# Altium PCB PCB1_2.pcbdoc (part 1 of 2)
Units mil, origin at the board's own origin, x right, y up, seen from the top; angles counter-clockwise.
Board outline 3210 x 4490.62 mil, 2 copper layers (Top Layer, Bottom Layer); 32 components, 15 nets, 80 pads, 138 vias.
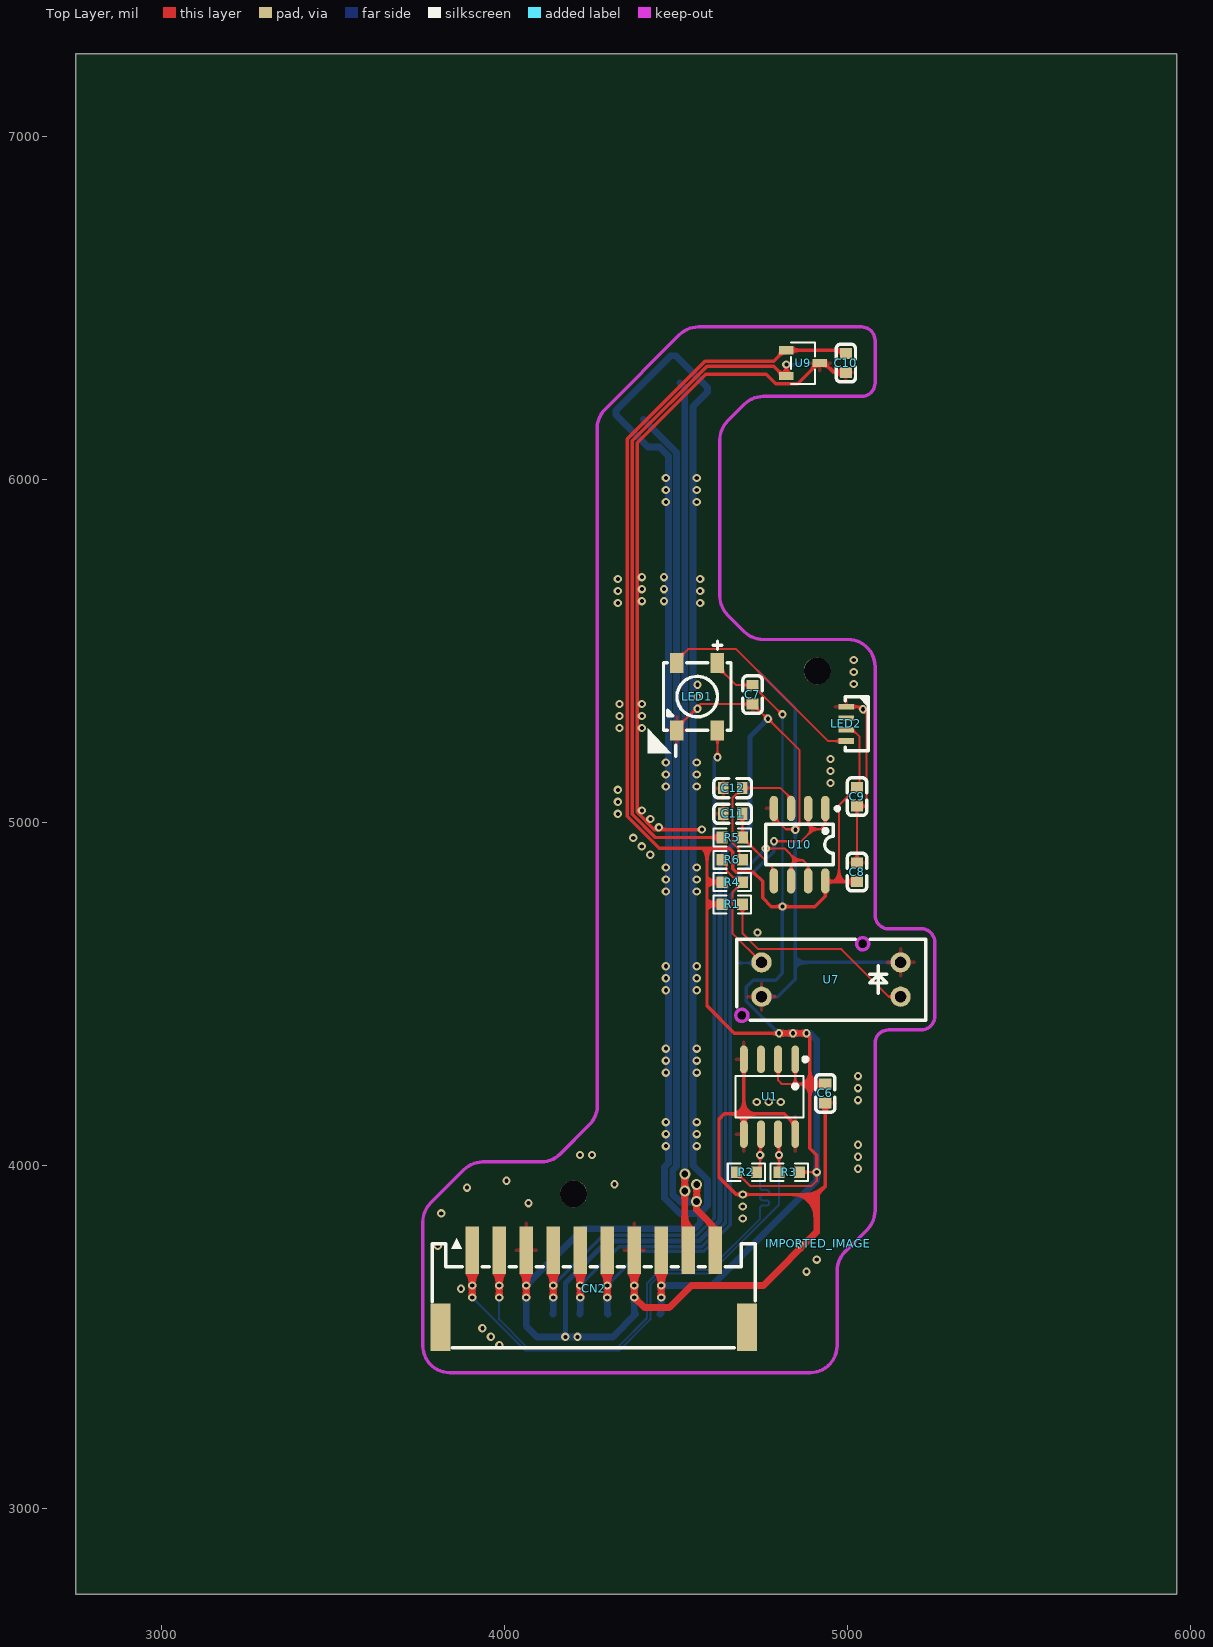
[diagram p0: Top Layer view]
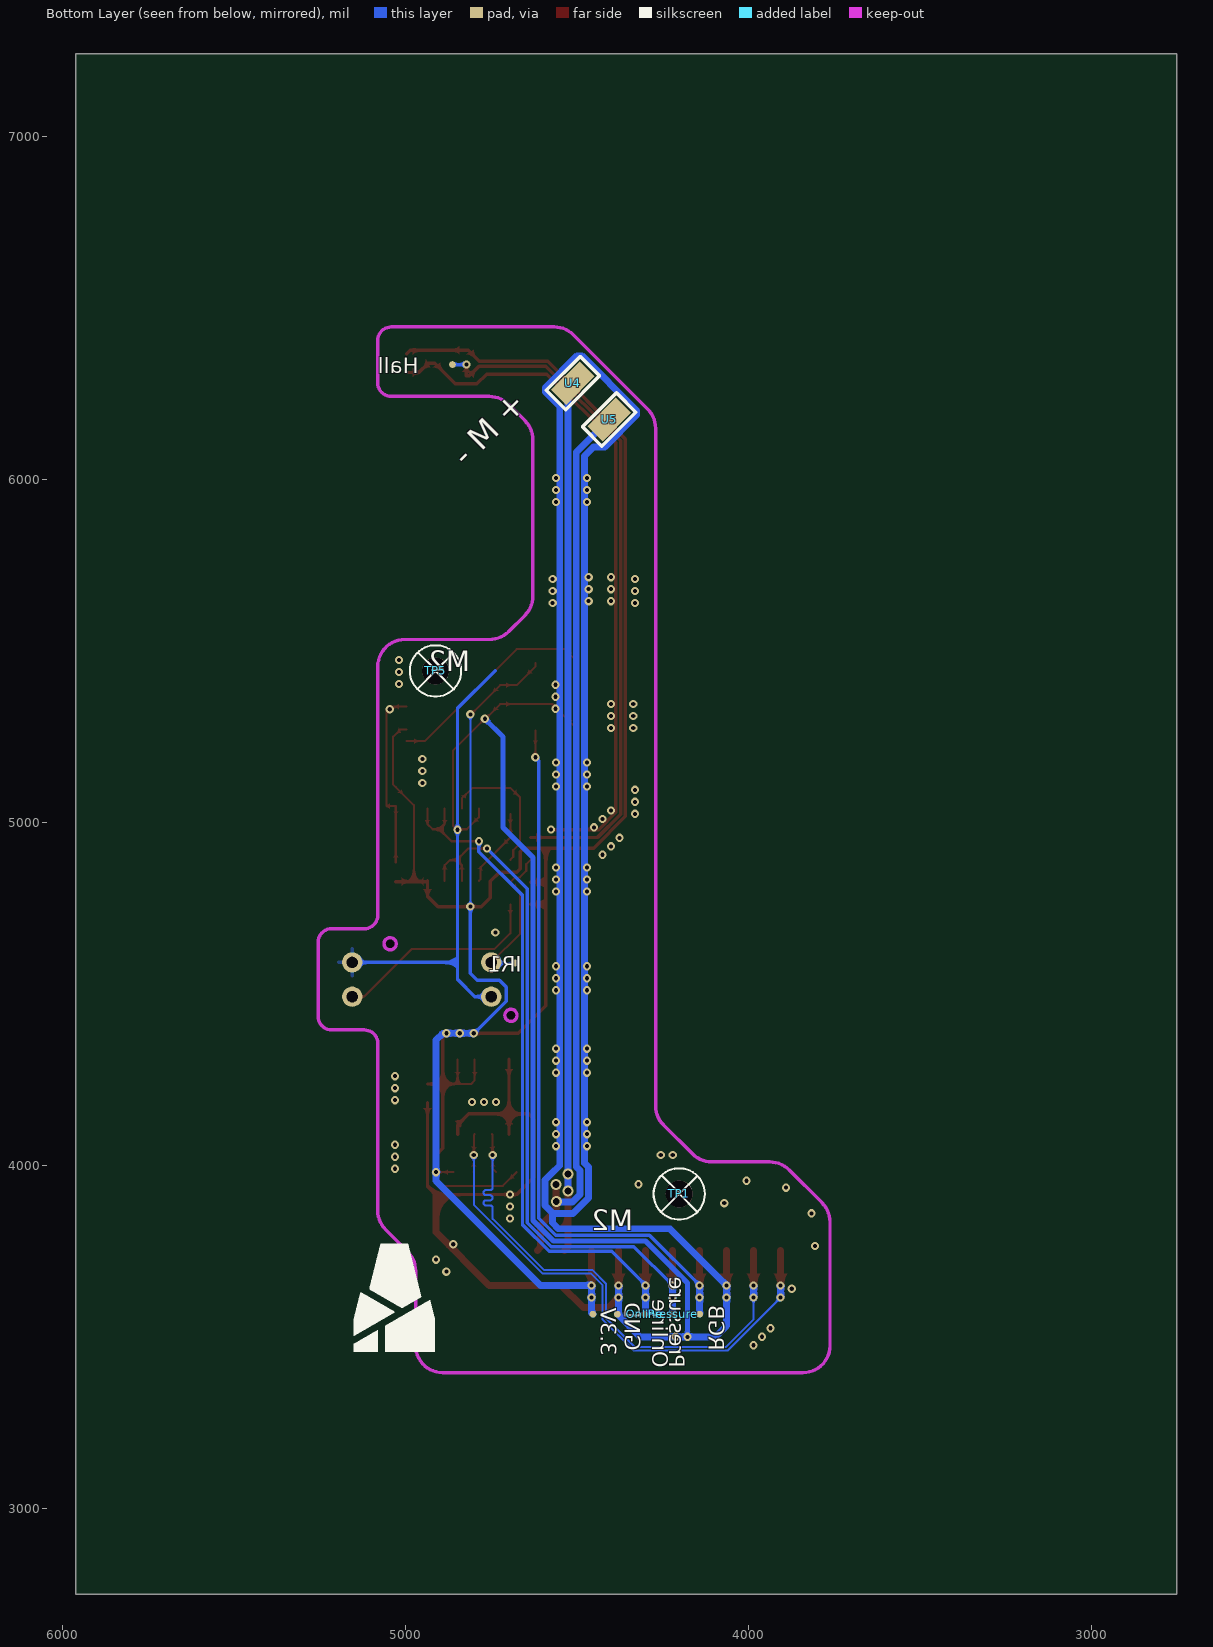
[diagram p1: Bottom Layer view, seen from below]

## Layer stack, top to bottom
Top Layer: signal copper (thickness not stored)
Dielectric: dielectric 12.6, FR-4, Dk 4.8
Bottom Layer: signal copper (thickness not stored)

## Board outline
5960,2750 2750,2750 2750,7240.62 5960,7240.62

## Design rules (kind name [scope] priority, off if disabled: settings)
BoardOutlineClearance copperThickness1oz [All] p0: genericclearance=10 ignorepadtopadclearanceinfootprint=FALSE except(0: Arc-SplitContinuation Track-SplitContinuation SMDPad-SplitContinuation THPad-SplitContinuation Via-SplitContinuation Fill-SplitContinuation Poly-SplitContinuation Region-SplitContinuation Text-SplitContinuation; 6: Track-CutoutEdge SMDPad-CutoutEdge THPad-CutoutEdge Via-CutoutEdge Region-CutoutEdge; 11.8: Track-OutlineEdge SMDPad-OutlineEdge THPad-OutlineEdge Via-OutlineEdge Fill-OutlineEdge Region-OutlineEdge Poly-OutlineEdge Text-OutlineEdge Fill-CutoutEdge)
BoardOutlineClearance copperThickness2oz [All] p0: genericclearance=10 ignorepadtopadclearanceinfootprint=FALSE except(0: Arc-SplitContinuation Track-SplitContinuation SMDPad-SplitContinuation THPad-SplitContinuation Via-SplitContinuation Fill-SplitContinuation Poly-SplitContinuation Region-SplitContinuation Text-SplitContinuation; 6: Track-CutoutEdge SMDPad-CutoutEdge THPad-CutoutEdge Via-CutoutEdge Region-CutoutEdge; 11.8: Track-OutlineEdge SMDPad-OutlineEdge THPad-OutlineEdge Via-OutlineEdge Fill-OutlineEdge Region-OutlineEdge Poly-OutlineEdge Text-OutlineEdge Fill-CutoutEdge)
Clearance copperThickness1oz [(InNet('GND') OR InNet('K_ONLINE') OR InNet('3.3V') OR InNet('MCU_SDA') OR InNet('K_PULL') OR InNet('MCU_SCL') OR InNet('MOTOR_LOUT') OR InNet('MOTOR_HOUT') OR InNet('RGB_OUT') OR InNet('IR1_RECV') OR InNet('HALL_OUT') OR InNet('$1N10852') OR InNet('$1N13047') OR InNet('IR1_RC') OR InNet('HALL_RC'))] p1: gap=7 ignorepadtopadclearanceinfootprint=FALSE except(4: Track-Track; 6: Track-SMDPad SMDPad-SMDPad Track-THPad SMDPad-THPad THPad-THPad Track-Via SMDPad-Via THPad-Via Via-Via SMDPad-Fill THPad-Fill Via-Fill Fill-Fill Track-Region SMDPad-Region THPad-Region Via-Region Region-Region Track-Poly SMDPad-Poly THPad-Poly Via-Poly Fill-Poly Region-Poly Poly-Poly Track-Text SMDPad-Text THPad-Text Via-Text Fill-Text Region-Text Poly-Text Text-Text; 6.9: Track-Hole SMDPad-Hole THPad-Hole Via-Hole Fill-Hole Region-Hole Poly-Hole Text-Hole Sheet-Hole; 11.8: Track-Fill Fill-Region Track-Sheet SMDPad-Sheet THPad-Sheet Via-Sheet Fill-Sheet Region-Sheet Poly-Sheet Text-Sheet)
Clearance copperThickness2oz [All] p1: gap=7 ignorepadtopadclearanceinfootprint=FALSE except(6: Track-SMDPad SMDPad-SMDPad Track-THPad SMDPad-THPad THPad-THPad Track-Via SMDPad-Via THPad-Via Via-Via SMDPad-Fill THPad-Fill Via-Fill Fill-Fill Track-Region SMDPad-Region THPad-Region Via-Region Region-Region Track-Poly SMDPad-Poly THPad-Poly Via-Poly Fill-Poly Region-Poly Poly-Poly Track-Text SMDPad-Text THPad-Text Via-Text Fill-Text Region-Text Poly-Text Text-Text; 6.9: Track-Hole SMDPad-Hole THPad-Hole Via-Hole Fill-Hole Region-Hole Poly-Hole Text-Hole Sheet-Hole; 8: Track-Track; 11.8: Track-Fill Fill-Region Track-Sheet SMDPad-Sheet THPad-Sheet Via-Sheet Fill-Sheet Region-Sheet Poly-Sheet Text-Sheet)
DiffPairsRouting differentialPair [All] p1: maxuncoupledlength=10 minlimit=6 maxlimit=6 mostfreqgap=6 toplayer_minwidth=5 toplayer_prefwidth=10 toplayer_maxwidth=100 bottomlayer_minwidth=5 bottomlayer_prefwidth=10 bottomlayer_maxwidth=100
PasteMaskExpansion pasteMaskExpansion [All] p1: expansion=0
PlaneConnect innerPlane [All] p1: planeconnectstyle=Relief reliefexpansion=20 reliefentries=4 reliefconductorwidth=10 reliefairgap=10
PolygonConnect copperRegion [All] p1: connectstyle=Relief reliefentries=4 reliefconductorwidth=10 polygonreliefangle="90 Angle" airgapwidth=10
RoutingVias viaSize [All] p1: viastyle="Through Hole" holewidth=12.0078 minholewidth=11.811 maxholewidth=248.0314 width=24.0158 minwidth=19.685 maxwidth=393.7008
SolderMaskExpansion solderMaskExpansion [All] p1: useseparateexpansions=TRUE expansion=2 expansionbottom=2
Width copperThickness1oz [All] p1: maxlimit=100 minlimit=5 preferedwidth=10
Width copperThickness2oz [All] p1: maxlimit=100 minlimit=8 preferedwidth=10

## Components (designator, comment, footprint, x,y, rotation, side; value= is the part's Value field where it differs from the comment)
3.3V "" Test-Point-0.5mm 4452.66,3565.98 r180 bottom
C6 "" C0603 4935,4209.69 r90 top
C7 "" C0603 4722.79,5372.44 r90 top
C8 "" C0603 5027.51,4855 r270 top
C9 "" C0603 5027.51,5075 r90 top
C10 "" C0603 4995,6339.37 r90 top
C11 "" C0603 4665,5025 r0 top
C12 "" C0603 4665,5100.11 r0 top
CN2 "" CONN-SMD_10P-P2.00_2.0-10P-WT 4259.74,3640.01 r0 top
GND "" Test-Point-0.5mm 4381.25,3565.98 r180 bottom
Hall "" Test-Point-0.5mm 4862.28,6334.9 r0 bottom
IMPORTED_IMAGE "IMPORTED_IMAGE" IMPORTED_IMAGE 4913.69,3771 r0 top
IR1 "" Test-Point-0.5mm 4679.68,4590 r180 bottom
LED1 "" LED-SMD_4P-L5.0-W5.0-BL_XL-5050RGBC 4561.55,5366.61 r180 top
LED2 "" LED-SMD_4P-L4.0-W1.7_XL-4020RGBC-WS2812B 4996.5,5287.12 r90 top
Online "" Test-Point-0.5mm 4301.25,3565.98 r180 bottom
Pressure "" Test-Point-0.5mm 4218.96,3565.98 r90 bottom
R1 "" R0603 4663.83,4760.92 r0 top
R2 "" R0603 4705,3980 r0 top
R3 "" R0603 4830,3980 r180 top
R4 "" R0603 4663.83,4825.92 r0 top
R5 "" R0603 4663.83,4955.92 r0 top
R6 "" R0603 4663.83,4890.92 r180 top
RGB "" Test-Point-0.5mm 4141.25,3565.98 r180 bottom
TP1 "" M2螺丝 4201.09,3916.66 r180 bottom
TP5 "" M2螺丝 4911.5,5441.69 r180 bottom
U1 "" SOIC-8_L4.9-W3.9-P1.27-LS6.0-BL 4772.29,4200 r180 top
U4 "" TEST-RING 4511.19,6280.71 r135 bottom
U5 "" TEST-RING 4405.13,6174.65 r135 bottom
U7 "" OPTO-TH_4P_ITR9606 4951.73,4541.73 r180 top
U9 "" SOT-23-3_L2.9-W1.6-P1.90-LS2.8-BR 4870,6339.37 r180 top
U10 "" SOP-8_L4.9-W3.9-P1.27-LS6.0-BL 4860,4935 r180 top

## Footprints (in the part's own frame and the unit in brackets; to place one, negate y for a bottom-side part, rotate by r counter-clockwise, add the part's x,y. Pads: shape width x height; smd on the part's side, far side on the other; paste and mask are expansions set on the pad)
C0603 [mm]
  rect 0.8x0.9 smd: 1(-0.7,0) 2(0.7,0)
  silkscreen extent -1.39,-0.71 1.39,0.71
CONN-SMD_10P-P2.00_2.0-10P-WT [mm]
  rect 1x3.5 smd: 1(-9,2.85) 2(-7,2.85) 3(-5,2.85) 4(-3,2.85) 5(-1,2.85) 6(1,2.85) 7(3,2.85) 8(5,2.85) 9(7,2.85) 10(9,2.85)
  rect 1.5x3.5 smd: 11(11.35,-2.85) 12(-11.35,-2.85)
  silkscreen extent -11.96,-4.37 11.95,3.74
IMPORTED_IMAGE [mil]
LED-SMD_4P-L4.0-W1.7_XL-4020RGBC-WS2812B [mm]
  rect 0.43x1.15 smd: 1(1.275,0) 2(0.425,0) 3(-0.425,0) 4(-1.275,0)
  silkscreen extent -2,-1.62 2,0.08
LED-SMD_4P-L5.0-W5.0-BL_XL-5050RGBC [mm]
  rect 1x1.5 smd: 1(-1.5,-2.5) 2(1.5,-2.5) 3(1.5,2.5) 4(-1.5,2.5)
  silkscreen extent -2.5,-4.1 2.5,4.4
M2螺丝 [mm]
  round 2 hole 2: 1(0,0)
  silkscreen extent -1.9,-1.9 1.9,1.9
OPTO-TH_4P_ITR9606 [mil]
  round 59.06 hole 32 slot 32.2 at 0 deg: 1(-202.77,50) 2(-202.77,-50)
  round 59.06 hole 32 slot 32.2 at 0 deg copper offset 0.02,0: 3(202.73,-50) 4(202.73,50)
  Board Outline Layer circle w0.2: c260.12,104.33 r17.72
  Board Outline Layer circle w0.2: c-92.28,-104.33 r17.72
  Board Outline Layer circle w10: c260.12,104.33 r17.72
  Board Outline Layer circle w10: c-92.28,-104.33 r17.72
  Multi-Layer board cut-out: 242.4,104.33 244.16,96.64 249.07,90.48 256.18,87.05 264.06,87.05 271.17,90.48 276.09,96.64 277.84,104.33 277.84,104.33 276.09,112.02 271.17,118.18 264.06,121.61 256.18,121.61 249.07,118.18 244.16,112.02 242.4,104.33
  Multi-Layer board cut-out: -110,-104.33 -107.54,-113.08 -101.07,-119.45 -92.28,-121.78 -83.5,-119.45 -77.03,-113.08 -74.57,-104.33 -74.57,-104.33 -77.03,-95.58 -83.5,-89.21 -92.29,-86.88 -101.07,-89.21 -107.54,-95.59 -110,-104.33
  silkscreen extent -276,-118 276,118
R0603 [mil]
  rect 31.75x34.02 smd: 1(-29.66,0) 2(29.66,0)
  silkscreen extent -55,-26 55,26
SOIC-8_L4.9-W3.9-P1.27-LS6.0-BL [mm]
  oval 0.588x2.045 smd: 1(-1.905,-2.772) 2(-0.635,-2.772) 3(0.635,-2.772) 4(1.905,-2.772) 5(1.905,2.772) 6(0.635,2.772) 7(-0.635,2.772) 8(-1.905,2.772)
  silkscreen extent -2.8,-2.92 2.53,1.52
SOP-8_L4.9-W3.9-P1.27-LS6.0-BL [mm]
  oval 0.63x1.865 smd: 1(-1.905,-2.682) 2(-0.635,-2.682) 3(0.635,-2.682) 4(1.905,-2.682) 5(1.905,2.682) 6(0.635,2.682) 7(-0.635,2.682) 8(-1.905,2.682)
  silkscreen extent -2.5,-1.5 2.5,1.48
SOT-23-3_L2.9-W1.6-P1.90-LS2.8-BR [mm]
  rect 1.07x0.6 smd: 1(1.235,-0.95) 2(1.235,0.95) 3(-1.235,0)
  silkscreen extent -0.88,-1.54 0.88,1.54
Test-Point-0.5mm [mm]
  round 0.5 smd: 1(0,0)
TEST-RING [mm]
  rect 3x1.6 smd: 1(0,0)
  silkscreen extent -1.78,-1.02 1.78,1.02

## Via types
v1: diameter 24.02, hole 12.01, Top Layer to Bottom Layer, 134 vias
v2: diameter 32, hole 20, Top Layer to Bottom Layer, 4 vias

## Nets (pads, with @x,y where several pads share a name; then routed paths per layer and width w, separated by ;. In a path a pad name is that pad's centre, name@x,y a point inside that pad or via, vN(x,y) a via of type N, cw(c..) or ccw(c..) an arc to the next point about the centre after c; other vN are vias at no path point)
3.3V: 3.3V.1 C6.2 C7.2 C8.2 C9.2 C10.2 CN2.8 LED1.1 LED2.3 R1.1 R2.1 R3.1 R4.1 U1.1 U1.2 U9.1 U10.8 | length 7773
  Top Layer w6: LED1.1@4620.6,5465.04 4620.6,5454.4 4675,5400 C7.2@4722.79,5400 4807.79,5315 v1(4810,5315) ; R2.1@4675.34,3980 4715.34,3940 4895,3940 4910,3955 v1(4910,3980.12) 4859.78,3980.12 R3.1@4859.66,3980 ; U1.2@4797.29,4309.15 4797.29,4247.71 4807.75,4237.25 4847.29,4237.25 ; U1.1@4847.29,4309.15 4847.29,4237.25 ; 4890,4237.25 4847.29,4237.25 ; U10.8@4935,4829.39 U10.8@4936.95,4827.44 ; 4974.9,4827.44 4974.9,5049.94 C9.2@5027.51,5102.56 5035,5110.05 5035,5250 5014.6,5270.4 LED2.3@4996.5,5270.4
  Top Layer w10: R1.1@4634.17,4760.92 4590,4760.92 ; R4.1@4634.17,4825.92 4590,4825.92 ; v1(4800,4385) 4670,4385 4590,4465 4590,4760.92 ; v1(4880,4385) 4890,4375 4890,4237.25 ; v1(4910,3980.12) 4910,4030 4890,4050 4890,4237.25 ; C6.2@4935,4237.25 4890,4237.25 ; U10.8@4935,4829.39 4935,4785 4904.42,4754.42 v1(4810,4754.42) 4777.65,4754.42 4752.07,4780 4752.07,4827.93 4725,4855 4675,4855 4665,4865 4665,4915 4655,4925 4590,4925 ; U10.8@4936.95,4827.44 4974.9,4827.44 C8.2@5027.51,4827.44 ; C10.2@4995,6366.93 4985.16,6376.77 U9.1@4821.38,6376.77 4816.77,6376.77 4784.12,6344.12 4584.12,6344.12 4357.99,6117.99 4357.99,5017.37 4450.36,4925 4590,4925 ; 4590,4760.92 4590,4825.92 ; 4590,4825.92 4590,4925
  Top Layer w20: v1(4456.59,3615) v1(4456.59,3650) CN2.8@4456.59,3752.22 ; v1(4800,4385) v1(4840.77,4385) v1(4880,4385)
  Bottom Layer w6: v1(4810,4754.42) v1(4810,5315)
  Bottom Layer w10: v1@4798.41,4385 4705,4478.41 4705,4520 4725,4540 4790,4540 4810,4560 v1(4810,4754.42)
  Bottom Layer w20: 3.3V.1@4452.66,3565.98 4456.59,3569.91 v1(4456.59,3615) v1(4456.59,3650) 4605,3650 4910,3955 v1(4910,3980.12) 4910,4365 4890,4385 v1(4880,4385) v1(4840.77,4385) v1(4800,4385)
$1N10852: LED1.2 LED2.4 | length 626
  Top Layer w6: LED1.2@4502.5,5465.04 4502.5,5472.5 4535,5505 4675,5505 4943.07,5236.93 LED2.4@4996.5,5236.93
$1N13047: R1.2 U7.1 | length 621.9
  Top Layer w6: R1.2@4693.49,4760.92 4693.49,4676.51 4739.76,4630.24 4981.75,4630.24 5120.26,4491.73 U7.1@5154.49,4491.73
GND: C6.1 C7.1 C8.1 C9.1 C10.1 C11.1 C12.1 CN2.3 CN2.7 GND.1 LED1.3 LED2.1 U1.4 U1.5 U1.8 U7.2 U7.4 U9.3 U10.4 | length 15685.4
  Top Layer w6: LED1.3@4502.5,5268.19 4502.5,5276.39 4570.99,5344.88 C7.1@4722.79,5344.88 4765.46,5302.21 v1(4767.79,5302.21) 4860,5210 4860,4990 4850,4980 4820,4980 4785,5015 U10.4@4785,5040.61 ; LED2.1@4996.5,5337.32 5037.68,5337.32 5055,5320 5055,5047.44 C9.1@5027.51,5047.44 C8.1@5027.51,4882.56
  Top Layer w10: v1(4575,4978.91) 4436.1,4978.91 4386.02,5028.98 4386.02,6106.38 4586.95,6307.31 4762.69,6307.31 4790.83,6279.17 4854.17,6279.17 4914.37,6339.37 U9.3@4918.62,6339.37 4932.77,6339.37 4960.33,6311.81 C10.1@4995,6311.81 ; U1.5@4697.29,4090.85 4697.29,4150 ; U1.4@4697.29,4309.15 4697.29,4150 ; U1.8@4847.29,4090.85 4847.29,4117.71 4815,4150 4697.29,4150 ; C6.1@4935,4182.13 4935,3940 4910,3915 v1(4694.11,3915) 4675,3915 4625,3965 4625,4135 4640,4150 4697.29,4150
  Top Layer w20: v1(4062.89,3615) v1(4062.89,3650) CN2.3@4062.89,3752.22 ; CN2.7@4377.85,3752.22 v1(4377.85,3650) v1(4377.85,3615) 4407.85,3585 4480,3585 4545,3650 4755,3650 4910,3805 4910,3915
  Bottom Layer w10: 4737.56,5442.44 4847.56,5332.44 v1(4847.56,4978.48) 4847.56,4591.73 ; U7.4@4748.99,4491.73 4796.73,4491.73 4847.56,4542.56 4847.56,4591.73 ; U7.2@5154.49,4591.73 4847.56,4591.73
  Bottom Layer w15: v1(4177.03,3500) 4177.03,3657.03 4299.47,3779.47 4567.58,3779.47 4627.52,3839.4 4627.52,4897.52 4715,4985 4715,5249.42 v1(4767.79,5302.21)
  Bottom Layer w20: v1(4377.85,3650) v1(4377.85,3615) 4377.85,3569.38 GND.1@4381.25,3565.98 4315.27,3500 v1(4212.03,3500) v1(4177.03,3500) 4095,3500 4062.89,3532.11 v1(4062.89,3615) v1(4062.89,3650) 4227.89,3815 4552.87,3815 4570.49,3832.62 4570.49,3860.91 ; 4570.49,3860.91 4569.58,3860 4511.14,3860 4465.98,3905.15 4465.98,3994.85 4477.3,4006.16 4477.3,6068.51 4451.18,6094.63 4417.99,6094.63 4325.11,6187.51 4325.11,6200.75 4485.08,6360.72 4498.33,6360.72 4591.21,6267.84 4591.21,6254.6 4549.35,6212.74 4549.35,4000 4573.02,3976.33 4573.25,3976.33 4591.98,3957.6 4591.98,3882.4 4570.49,3860.91
  other v1: 3984.5,3475.5 3959.75,3500.25 3935,3525 3872.8,3640.01 4880,3690 4910,3725 3805,3765 4860,3770 4694.11,3845 3815,3860 4694.11,3880 4069.75,3889.75 3890,3935 4320,3945 4005,3955 5030,3990 5030,4025 4220,4030 4255,4030 4470,4055.94 4560,4055.94 5030,4060 4470,4090.94 4560,4090.94 4470,4125.94 4560,4125.94 4735,4185 4770,4185 4805,4185 5030,4190 5030,4225 5030,4260 4470,4270.24 4560,4270.24 4470,4305.24 4560,4305.24 4470,4340.24 4560,4340.24 4470,4510.42 4560,4510.42 4470,4545.42 4560,4545.42 4470,4580.42 4560,4580.42 4737.18,4678.95 4470,4798.52 4560,4798.52 4470,4833.52 4560,4833.52 4470,4868.52 4560,4868.52 4424.5,4905.5 4399.75,4930.25 4375,4955 4449.5,4985.5 4424.75,5010.25 4330,5025 4400,5035 4330,5060 4330,5095 4470,5105 4560,5105 4950,5115 4470,5140 4560,5140 4950,5150 4470,5175 4560,5175 4950,5185 4335,5275 4400,5275 4335,5310 4400,5310 5045.03,5329.97 4562.05,5331.37 4335,5345 4400,5345 4562.05,5366.37 4562.05,5401.37 5017.92,5403.33 5017.92,5438.33 5017.92,5473.33 4330,5640 4570,5640 4400,5645 4465,5645 4330,5675 4570,5675 4400,5680 4465,5680 4330,5710 4570,5710 4400,5715 4465,5715 4470,5933.83 4560,5933.83 4470,5968.83 4560,5968.83 4470,6003.83 4560,6003.83
HALL_OUT: Hall.1 R5.1 U9.2 | length 2004.3
  Top Layer w10: R5.1@4634.17,4955.92 4439.27,4955.92 4372.01,5023.18 4372.01,6112.19 4589.92,6330.1 4784.9,6330.1 4813.03,6301.97 U9.2@4821.38,6301.97 v1(4821.38,6335)
  Bottom Layer w10: v1(4821.38,6335) 4862.18,6335 Hall.1@4862.28,6334.9
HALL_RC: C11.2 R5.2 U10.5 | length 233.9
  Top Layer w6: C11.2@4692.56,5025 4693.49,5024.06 R5.2@4693.49,4955.92 4780,4869.41 4780,4834.39 U10.5@4785,4829.39
IR1_RC: C12.2 R6.1 U10.3 | length 416.7
  Top Layer w6: R6.1@4693.49,4890.92 4685,4899.41 4685,4918.82 4665,4938.82 4665,5072.56 C12.2@4692.56,5100.11 4804.89,5100.11 4835,5070 U10.3@4835,5040.61
IR1_RECV: IR1.1 R4.2 R6.2 U7.3 | length 448.4
  Top Layer w6: R6.2@4634.17,4890.92 4647.02,4878.07 4647.02,4858.66 4665.75,4839.93 4679.48,4839.93 R4.2@4693.49,4825.92 4665,4797.42 4665,4675.7 U7.3@4748.99,4591.73
  Bottom Layer w6: IR1.1@4679.68,4590 4747.24,4590 U7.3@4748.99,4591.73
K_ONLINE: CN2.6 Online.1 U10.1 U10.2 | length 2108.2
  Top Layer w6: v1(4785,4945) 4865,4945 4900,4980 ; U10.2@4885,5040.61 4885,4995 4900,4980 ; U10.1@4935,5040.61 4935,4995 4920,4980 4900,4980
  Top Layer w20: v1(4299.11,3615) v1(4299.11,3650) CN2.6@4299.11,3752.22
  Bottom Layer w10: v1(4299.11,3650) 4398.05,3748.94 4580.23,3748.94 4658.05,3826.75 4658.05,4788.05 4785,4915 v1(4785,4945)
  Bottom Layer w20: v1(4299.11,3650) v1(4299.11,3615) 4299.11,3568.08 Online.1@4301.21,3565.98
K_PULL: CN2.5 Pressure.1 U10.6 U10.7 | length 2117.3
  Top Layer w6: v1(4761.24,4923.76) 4816.24,4923.76 4850,4890 ; U10.6@4835,4829.39 4835,4875 4850,4890 ; U10.7@4885,4829.39 4885,4875 4870,4890 4850,4890
  Top Layer w20: v1(4220.37,3615) v1(4220.37,3650) CN2.5@4220.37,3752.22
  Bottom Layer w10: v1(4220.37,3650) 4333.33,3762.95 4574.42,3762.95 4644.03,3832.56 4644.03,4806.55 v1(4761.24,4923.76)
  Bottom Layer w20: Pressure.1@4218.92,3565.98 4220.37,3567.43 v1(4220.37,3615) v1(4220.37,3650)
MCU_SCL: CN2.1 R3.2 U1.7 | length 1622.9
  Top Layer w6: U1.7@4797.29,4090.85 4800,4088.14 v1(4800,4030) 4800,3980.34 R3.2@4800.34,3980
  Top Layer w20: v1(3905.41,3615) v1(3905.41,3650) CN2.1@3905.41,3752.22
  Bottom Layer w6: v1@3905.41,3614.59 4060.02,3459.98 4334.15,3459.98 4425.02,3550.85 4425.02,3651.38 4458.64,3685 4600,3685 4800,3885 v1(4800,4030)
  Bottom Layer w20: v1(3905.41,3615) v1(3905.41,3650)
MCU_SDA: CN2.2 R2.2 U1.6 | length 1627
  Top Layer w6: R2.2@4734.66,3980 4745,3990.34 v1(4745,4030) 4745,4088.56 U1.6@4747.29,4090.85
  Top Layer w20: v1(3984.15,3615) v1(3984.15,3650) CN2.2@3984.15,3752.22
  Bottom Layer w6: v1(3984.15,3615) 3984.15,3550.85 4065,3470 4330,3470 4415,3555 4415,3655.52 4454.49,3695.02 4595.85,3695.02 4745,3844.16 4745,3875.46 cw(c4752.5,3875.46) 4752.5,3882.96 4764.05,3882.96 ccw(c4764.05,3890.46) 4764.05,3897.96 4752.5,3897.96 cw(c4752.5,3905.46) 4752.5,3912.96 4764.05,3912.96 ccw(c4764.05,3920.46) 4764.05,3927.96 4752.5,3927.96 cw(c4752.5,3935.46) 4745,3935.46 v1(4745,4030)
  Bottom Layer w20: v1(3984.15,3615) v1(3984.15,3650)
MOTOR_HOUT: CN2.9 U4.1 | length 2588.5
  Top Layer w20: v2(4525.33,3975) v2(4525.33,3925) 4525.33,3762.22 CN2.9@4535.33,3752.22
  Bottom Layer w20: U4.1@4511.19,6280.71 4525.33,6266.57 v2(4525.33,3975) v2(4525.33,3925)
MOTOR_LOUT: CN2.10 U5.1 | length 2599.1
  Top Layer w20: v2(4560,3944.35) 4560,3895.65 v2(4559.35,3895) 4559.35,3870.65 4579.35,3850.65 ; 4579.35,3850 4579.35,3850.65 ; CN2.10@4614.07,3752.22 4605,3761.29 4605,3825 4579.35,3850.65
  Bottom Layer w20: U5.1@4405.13,6174.65 4501.32,6078.45 4501.32,3996.22 4490,3984.9 4490,3915.1 4512.09,3893.02 4557.36,3893.02 v2(4559.35,3895)
RGB_OUT: CN2.4 LED1.4 RGB.1 | length 2197.9
  Top Layer w6: v1(4620.58,5190) LED1.4@4620.6,5268.19
  Top Layer w20: v1(4141.63,3615) v1(4141.63,3650) CN2.4@4141.63,3752.22
  Bottom Layer w10: v1(4141.63,3650) 4287.62,3795.98 4560.74,3795.98 4611,3846.24 4611,5180.42 v1(4620.58,5190)
  Bottom Layer w20: RGB.1@4141.25,3565.98 4141.63,3566.36 v1(4141.63,3615) v1(4141.63,3650)
pads on no net: CN2.11 CN2.12 LED2.2 TP1.1 TP5.1 U1.3

## Polygon pours and split planes (outlines as drawn)
GND on Top Layer (solid, remove dead copper, pour order 0): 3000,6695 5710,6695 5710,3000 3000,3000
GND on Bottom Layer (solid, remove dead copper, pour order 2): 3205,6735 5480,6735 5480,3150 3205,3150

## Keep-outs
Board Outline Layer:
  lines w10: 3761.41,3474.21 3761.41,3834.84 cw(c3840.15,3834.84) 3784.47,3890.52 3880.9,3986.95 cw(c3936.58,3931.27) 3936.58,4010.01 4106.35,4010.01 ccw(c4106.35,4088.75) 4162.03,4033.07 4246.94,4117.98 ccw(c4191.26,4173.66) 4270,4173.66 4270,6149.43 cw(c4348.74,6149.43) 4293.06,6205.11 4509.65,6421.7 cw(c4565.33,6366.02) 4565.33,6444.76 5040.63,6444.76 cw(c5040.63,6405.39) 5080,6405.39 5080,6281.42 cw(c5040.63,6281.42) 5040.63,6242.05 4754.41,6242.05 ccw(c4754.41,6163.31) 4698.73,6218.98 4650.53,6170.79 ccw(c4706.21,6115.11) 4627.47,6115.11 4627.47,5660.14 ccw(c4706.21,5660.14) 4650.53,5604.47 4698.73,5556.27 ccw(c4754.41,5611.95) 4754.41,5533.21 5001.26,5533.21 cw(c5001.26,5454.47) 5080,5454.47 5080,4729.37 ccw(c5119.37,4729.37) 5119.37,4690 5214.6,4690 cw(c5214.6,4650.63) 5253.97,4650.63 5253.97,4434.37 cw(c5214.6,4434.37) 5214.6,4395 5119.37,4395 ccw(c5119.37,4355.63) 5080,4355.63 5080,3868.18 cw(c5001.26,3868.18) 5056.94,3812.5 4992.5,3748.06 ccw(c5048.18,3692.38) 4969.44,3692.38 4969.44,3474.21 cw(c4890.7,3474.21) 4890.7,3395.47 3840.15,3395.47 cw(c3840.15,3474.21) 3761.41,3474.21

## Other copper
Top Layer:
  region net $1N13047: 5120.26,4488.73 5120.26,4494.73 5121.56,4494.89 5122.75,4495.36 5123.84,4496.09 5124.85,4497.05 5125.78,4498.21 5126.66,4499.53 5128.29,4502.51 5131.39,4508.87 5133.06,4511.68 5133.97,4512.87 5134.95,4513.88 5134.95,4469.58 5133.97,4470.59 5133.06,4471.78 5131.39,4474.59 5128.29,4480.95 5126.66,4483.93 5125.78,4485.25 5124.85,4486.41 5123.84,4487.37 5122.75,4488.1 5121.56,4488.57
  region net GND: 5057.12,5322.12 5052.88,5317.88 5052.14,5318.34 5051.18,5318.55 5048.83,5318.48 5046.35,5318.13 5044.28,5317.98 5057.02,5330.72 5056.87,5328.65 5056.52,5326.17 5056.45,5323.82 5056.66,5322.86
  region net GND: 5054.23,5050.44 5054.23,5044.44 ccw(c5054.23,5033.19) 5045.23,5039.94 5045.23,5054.94 ccw(c5054.23,5061.69)
  region net GND: 5024.51,4907.31 5030.51,4907.31 ccw(c5041.76,4907.31) 5035.01,4898.31 5020.01,4898.31 ccw(c5013.26,4907.31)
  region net GND: 5030.51,5022.69 5024.51,5022.69 ccw(c5013.26,5022.69) 5020.01,5031.69 5035.01,5031.69 ccw(c5041.76,5022.69)
  region net 3.3V: 5022.32,5266.92 5022.01,5258.75 ccw(c5012.46,5246.02) 5012.46,5261.93 5019.14,5276.47 ccw(c5035.05,5276.47)
  region net GND: 5024.76,5334.32 5035.86,5340.32 5038.38,5340.53 5040.06,5341.03 5041.75,5341.58 5044.26,5341.95 5033.16,5328.14 5032.79,5329.46 5032.13,5330.66 5031.24,5331.71 5030.15,5332.61 5028.91,5333.33 5027.56,5333.87 5026.17,5334.2
  region net GND: 5028.14,5340.32 5028.14,5334.32 ccw(c5028.14,5323.07) 5019.14,5329.82 5019.14,5344.82 ccw(c5028.14,5351.57)
  region net 3.3V: 5012.83,5083.63 5006.61,5085.9 ccw(c4993.89,5095.45) 5009.8,5095.45 5022.37,5086.81 ccw(c5022.37,5070.9)
  region net 3.3V: 4994.79,4822.44 4994.79,4832.44 ccw(c4994.79,4851.19) 5009.79,4839.94 5009.79,4814.94 ccw(c4994.79,4803.69)
  region net GND: 4962.28,6306.81 4962.28,6316.81 ccw(c4962.28,6335.56) 4977.28,6324.31 4977.28,6299.31 ccw(c4962.28,6288.06)
  region net $1N10852: 4964.86,5233.93 4964.86,5239.93 ccw(c4964.86,5251.18) 4973.86,5244.43 4973.86,5229.43 ccw(c4964.86,5222.68)
  region net 3.3V: 4971.9,4862.44 cw(c4928.4,4862.44) 4959.9,4832.44 4974.9,4827.44 4989.9,4832.44 cw(c5021.4,4862.44) 4977.9,4862.44
  region net 3.3V: 4962.4,4832.44 4962.4,4822.44 4956.89,4822.32 4954.36,4822.04 4952.09,4821.5 4950.17,4820.61 4949.37,4820 4948.69,4819.28 4948.14,4818.42 4947.74,4817.42 4947.49,4816.26 4947.4,4814.94 4947.4,4839.94 4947.49,4838.62 4947.74,4837.46 4948.14,4836.46 4948.69,4835.6 4949.37,4834.88 4950.17,4834.27 4952.09,4833.38 4954.36,4832.84 4956.89,4832.56
  region net GND: 4944.99,6334.22 4942.81,6322.26 ccw(c4926.9,6301.04) 4926.9,6327.56 4939.69,6350.13 ccw(c4966.2,6350.13)
  region net GND: 4940,4151.38 4930,4151.38 ccw(c4911.25,4151.38) 4922.5,4166.38 4947.5,4166.38 ccw(c4958.75,4151.38)
  region net 3.3V: 4940,4790.08 4930,4790.08 4929.92,4791.47 4929.68,4792.84 4928.84,4795.45 4927.66,4797.86 4926.3,4800.02 4923.76,4803.37 4922.92,4804.45 4922.6,4805.08 4947.4,4805.08 4947.08,4804.45 4946.24,4803.37 4943.7,4800.02 4942.34,4797.86 4941.16,4795.45 4940.32,4792.84 4940.08,4791.47
  region net K_ONLINE: 4938,4997.42 4932,4997.42 4931.9,4998.55 4931.61,4999.78 4930.59,5002.34 4929.15,5004.69 4928.34,5005.66 4927.5,5006.42 4942.5,5006.42 4941.66,5005.66 4940.85,5004.69 4939.41,5002.34 4938.39,4999.78 4938.1,4998.55
  region net 3.3V: 4902.28,4232.25 4902.28,4242.25 ccw(c4902.28,4261) 4917.28,4249.75 4917.28,4224.75 ccw(c4902.28,4213.5)
  region net GND: 4925.66,3937.73 4932.73,3930.66 ccw(c5004.15,3859.24) 4920,3915.1 4910.1,3925 ccw(c4854.24,4009.15)
  region net 3.3V: 4962.28,6371.77 4962.28,6381.77 ccw(c4962.28,6506.4) 4977.28,6382.68 4977.28,6364.27 ccw(c4962.28,6353.02)
  region net 3.3V: 4857.44,6381.77 4857.44,6371.77 ccw(c4857.44,6351.85) 4842.44,6364.96 4842.44,6388.58 ccw(c4857.44,6401.69)
  region net K_PULL: 4882,4872.58 4888,4872.58 4888.1,4871.45 4888.39,4870.22 4889.41,4867.66 4890.85,4865.31 4891.66,4864.34 4892.5,4863.58 4877.5,4863.58 4878.34,4864.34 4879.15,4865.31 4880.59,4867.66 4881.61,4870.22 4881.9,4871.45
  region net 3.3V: 4893.54,4378.54 4886.46,4371.46 4885.66,4372.14 4884.86,4372.58 4884.04,4372.85 4883.19,4372.97 4879.25,4373.02 4891.98,4385.75 4892.03,4381.81 4892.15,4380.96 4892.42,4380.14 4892.86,4379.34
  region net K_ONLINE: 4888,4997.42 4882,4997.42 4881.9,4998.55 4881.61,4999.78 4880.59,5002.34 4879.15,5004.69 4878.34,5005.66 4877.5,5006.42 4892.5,5006.42 4891.66,5005.66 4890.85,5004.69 4889.41,5002.34 4888.39,4999.78 4888.1,4998.55
  region net 3.3V: 4893.65,3977.12 4893.65,3983.12 4895.18,3983.26 4896.4,3983.64 4897.41,3984.23 4898.28,3985 4899.95,3986.92 4902.06,3989.13 4902.06,3971.12 4899.95,3973.32 4898.28,3975.24 4897.41,3976.01 4896.4,3976.61 4895.18,3976.99
  region net 3.3V: 4884.54,3983.12 4884.54,3977.12 ccw(c4884.54,3965.87) 4875.54,3972.62 4875.54,3987.62 ccw(c4884.54,3994.37)
  region net GND: 4904.33,6322.26 4892.26,6324.33 ccw(c4871.05,6340.24) 4897.56,6340.24 4920.24,6327.56 ccw(c4920.24,6301.04)
  region net K_ONLINE: 4883.03,4992.73 cw(c4870.3,4980) 4883.03,4967.27 4888.51,4964.27 cw(c4919.24,4933.54) 4919.24,4977 4919.24,4983 cw(c4919.24,5026.46) 4888.51,4995.73
  region net 3.3V: 4855,4234.25 cw(c4855,4204.25) 4885,4204.25 4895,4202.25 cw(c4925,4202.25) 4925,4232.25 4925,4242.25 cw(c4925,4272.25) 4895,4272.25 4885,4270.25 cw(c4855,4270.25) 4855,4240.25
  region net 3.3V: 4855.18,4395 4855.18,4375 4852.54,4374.91 4850.03,4374.69 4845.65,4374 4842.43,4373.31 4840.77,4372.99 4840.77,4397.01 4842.43,4396.69 4845.65,4396 4850.03,4395.31 4852.54,4395.09
  region net 3.3V: 4865.59,4375 4865.59,4395 4868.24,4395.09 4870.74,4395.31 4875.12,4396 4878.34,4396.69 4880,4397.01 4880,4372.99 4878.34,4373.31 4875.12,4374 4870.74,4374.69 4868.24,4374.91
  region net 3.3V: 4826.35,4759.42 4826.35,4749.42 4825.21,4749.33 4824.08,4749.07 4821.86,4748.16 4819.79,4746.88 4817.94,4745.41 4817.94,4763.42 4819.79,4761.95 4821.86,4760.67 4824.08,4759.76 4825.21,4759.51
  region net GND: 4857.8,4992.04 4861.35,4987.11 4860.35,4985.92 4859.74,4984.8 4859.46,4983.71 4859.39,4982.59 4859.54,4980.14 4859.59,4978.7 4859.49,4977.08 4847.46,4990.49 4850.5,4990.31 4853.12,4990.1 4854.32,4990.18 4855.48,4990.48 4856.64,4991.08
  region net 3.3V: 4850.29,4262.65 4844.29,4262.65 4844.19,4263.81 4843.91,4265.04 4842.89,4267.54 4841.44,4269.85 4839.79,4271.65 4854.79,4271.65 4853.14,4269.85 4851.7,4267.54 4850.68,4265.04 4850.39,4263.81
  region net K_PULL: 4832,4872.58 4838,4872.58 4838.1,4871.45 4838.39,4870.22 4839.41,4867.66 4840.85,4865.31 4841.66,4864.34 4842.5,4863.58 4827.5,4863.58 4828.34,4864.34 4829.15,4865.31 4830.59,4867.66 4831.61,4870.22 4831.9,4871.45
  region net GND: 4830.14,4977 4832.41,4983 4834,4983.12 4835.2,4983.47 4836.14,4984 4836.93,4984.69 4838.5,4986.43 4839.51,4987.41 4840.82,4988.42 4838.54,4970.55 4836.64,4972.92 4834.89,4974.99 4833.94,4975.81 4832.86,4976.45 4831.62,4976.86
  region net K_PULL: 4838.51,4874.27 cw(c4869.24,4843.54) 4869.24,4887 4869.24,4893 cw(c4869.24,4936.46) 4838.51,4905.73 4833.03,4902.73 cw(c4820.3,4890) 4833.03,4877.27
  region net GND: 4874.86,3784 4880.09,3760.94 4879.3,3760.29 4878.53,3759.89 4877.78,3759.72 4877.04,3759.74 4875.59,3760.18 4874.15,3760.93 4872.7,3761.7 4871.22,3762.17 4870.45,3762.21 4869.68,3762.07 4868.88,3761.71 4868.05,3761.09 4868.21,3778.76 4869.25,3778.04 4870.12,3777.96 4870.88,3778.38 4871.57,3779.2 4873,3781.53 4873.85,3782.81
  region net GND: 4869.06,3749.91 4846,3755.14 4847.19,3756.15 4848.47,3757 4850.8,3758.43 4851.62,3759.12 4852.04,3759.88 4851.96,3760.75 4851.24,3761.79 4868.91,3761.95 4868.29,3761.12 4867.93,3760.32 4867.79,3759.55 4867.83,3758.78 4868.3,3757.3 4869.07,3755.85 4869.82,3754.41 4870.26,3752.96 4870.28,3752.22 4870.11,3751.47 4869.71,3750.7
  region net GND: 4833.15,4124.78 4838.4,4133.67 4839.49,4132.69 4840.54,4131.95 4841.54,4131.44 4842.51,4131.1 4844.38,4130.82 4846.22,4130.86 4848.09,4130.93 4850.05,4130.76 4851.09,4130.49 4852.17,4130.06 4853.31,4129.44 4854.51,4128.58 4840.07,4110.49 4838.22,4112.29 4837.16,4114.02 4836.63,4115.7 4836.39,4117.38 4836.17,4119.1 4835.73,4120.87 4834.8,4122.76
  region net 3.3V: 4850.29,4258.25 ccw(c4880.29,4258.25) 4856.29,4240.25 4847.29,4237.25 4838.29,4240.25 ccw(c4814.29,4258.25) 4844.29,4258.25
  region net HALL_OUT: 4826.38,6318.65 4816.38,6318.65 4816.28,6319.79 4816.03,6320.92 4815.12,6323.14 4813.84,6325.21 4812.37,6327.06 4830.38,6327.06 4828.91,6325.21 4827.63,6323.14 4826.72,6320.92 4826.47,6319.79
  region net HALL_OUT: 4816.38,6328.78 4826.38,6328.78 ccw(c4845.12,6328.78) 4833.88,6313.78 4808.88,6313.78 ccw(c4797.62,6328.78)
  region net 3.3V: 4826.36,4375 4826.36,4395 4829.01,4395.09 4831.51,4395.31 4835.89,4396 4839.11,4396.69 4840.77,4397.01 4840.77,4372.99 4839.11,4373.31 4835.89,4374 4831.51,4374.69 4829.01,4374.91
  region net 3.3V: 4814.41,4395 4814.41,4375 4811.76,4374.91 4809.26,4374.69 4804.88,4374 4801.66,4373.31 4800,4372.99 4800,4397.01 4801.66,4396.69 4804.88,4396 4809.26,4395.31 4811.76,4395.09
  region net IR1_RC: 4820.83,5079.92 4828.15,5081.09 4829.99,5079.67 4832.24,5078.53 4834.64,5077.68 4836.95,5077.17 4823.73,5070.09 4824.14,5071.34 4824.26,5072.64 4824.14,5073.96 4823.79,5075.28 4823.26,5076.56 4822.57,5077.77
  region net GND: 4781.47,5292.77 4777.23,5288.53 4776.05,5289.51 4774.92,5290.11 4773.79,5290.4 4772.63,5290.48 4770.09,5290.29 4767.04,5290.23 4779.77,5302.96 4779.71,5299.91 4779.52,5297.37 4779.6,5296.21 4779.89,5295.08 4780.49,5293.95
  region net GND: 4800.19,5004.05 4795.16,5000.59 4794.3,5001.32 4793.24,5001.99 4790.78,5003.08 4788.16,5003.76 4785.77,5003.92 4797.13,5013.71 4797,5012.55 4797.05,5011.27 4797.64,5008.58 4798.74,5006.04 4799.43,5004.95
  region net GND: 4929.14,3941.21 cw(c4877.93,3992.43) 4877.93,3920 4840,3910 cw(c4840,3850) 4900,3850 4919.81,3916.95 4938.54,3936.46
  region net GND: 4710.46,3920 4710.46,3910 4709.32,3909.91 4708.19,3909.66 4705.97,3908.75 4703.9,3907.47 4702.05,3905.99 4702.05,3924.01 4703.9,3922.53 4705.97,3921.25 4708.19,3920.34 4709.32,3920.09
  region net 3.3V: 4806.73,6359.66 4795.01,6362.08 ccw(c4773.8,6377.99) 4800.31,6377.99 4822.64,6364.96 ccw(c4822.64,6338.44)
  region net MCU_SCL: 4797,4046.35 4803,4046.35 4803.13,4044.82 4803.52,4043.6 4804.11,4042.59 4804.88,4041.72 4806.8,4040.05 4809.01,4037.94 4790.99,4037.94 4793.2,4040.05 4795.12,4041.72 4795.89,4042.59 4796.48,4043.6 4796.87,4044.82
  region net MCU_SCL: 4803,4046.35 4797,4042.84 4796.91,4044.1 4796.64,4045.41 4796.2,4046.73 4795.62,4048.01 4794.9,4049.21 4794.06,4050.27 4793.11,4051.17 4792.06,4051.84 4806.65,4055.35 4805.31,4053.33 4804.14,4051.07 4803.31,4048.71 4803.08,4047.52
  region net MCU_SCL: 4803,4013.65 4797,4013.65 4796.87,4015.18 4796.48,4016.4 4795.89,4017.41 4795.12,4018.28 4793.2,4019.95 4790.99,4022.06 4809.01,4022.06 4806.8,4019.95 4804.88,4018.28 4804.11,4017.41 4803.52,4016.4 4803.13,4015.18
  region net MCU_SCL: 4797,4006.01 4803,4006.01 ccw(c4814.25,4006.01) 4807.5,3997.01 4792.5,3997.01 ccw(c4785.75,4006.01)
  region net HALL_OUT: 4795.01,6312.92 4802.99,6319.08 ccw(c4818.9,6340.3) 4818.9,6313.78 4800.31,6297.01 ccw(c4773.8,6297.01)
  region net 3.3V: 4800.29,4262.65 4794.29,4262.65 4794.19,4263.81 4793.91,4265.04 4792.89,4267.54 4791.44,4269.85 4789.79,4271.65 4804.79,4271.65 4803.14,4269.85 4801.7,4267.54 4800.68,4265.04 4800.39,4263.81
  region net 3.3V: 4793.65,4749.42 4793.65,4759.42 4794.79,4759.51 4795.92,4759.76 4798.14,4760.67 4800.21,4761.95 4802.06,4763.42 4802.06,4745.41 4800.21,4746.88 4798.14,4748.16 4795.92,4749.07 4794.79,4749.33
  region net K_PULL: 4777.59,4926.76 4777.59,4920.76 4776.07,4920.62 4774.84,4920.24 4773.83,4919.65 4772.96,4918.88 4771.3,4916.96 4769.18,4914.75 4769.18,4932.76 4771.3,4930.56 4772.96,4928.63 4773.83,4927.87 4774.84,4927.27 4776.07,4926.89
  region net HALL_RC: 4777,4868.72 4783,4869.41 4783.11,4868.56 4783.42,4867.86 4783.9,4867.31 4784.53,4866.86 4786.09,4866.23 4787.88,4865.76 4774.15,4859.72 4775.2,4861.79 4776.11,4864.08 4776.76,4866.43
  region net 3.3V: 4796.09,5322.46 4798.68,5328.36 4799.82,5327.42 4800.99,5326.82 4802.21,5326.51 4803.46,5326.42 4806.17,5326.65 4809.19,5326.98 4798.22,5312.69 4798,5314.34 4797.97,5315.74 4798.09,5318.07 4798.02,5319.12 4797.73,5320.16 4797.13,5321.25
  region net 3.3V: 4743.69,5383.35 4737.48,5381.07 ccw(c4727.93,5368.34) 4727.93,5384.25 4740.51,5392.89 ccw(c4756.42,5392.89)
  region net IR1_RC: 4717.3,5103.11 4717.3,5097.11 ccw(c4717.3,5085.86) 4708.3,5092.61 4708.3,5107.61 ccw(c4717.3,5114.36)
  region net MCU_SDA: 4742,4046.35 4748,4046.35 4748.13,4044.82 4748.52,4043.6 4749.11,4042.59 4749.88,4041.72 4751.8,4040.05 4754.01,4037.94 4735.99,4037.94 4738.2,4040.05 4740.12,4041.72 4740.89,4042.59 4741.48,4043.6 4741.87,4044.82
  region net MCU_SDA: 4748,4043.04 4742,4046.01 4741.91,4047.18 4741.67,4048.38 4740.81,4050.76 4739.59,4053.02 4738.19,4055.01 4752.9,4052.04 4751.9,4051.35 4750.97,4050.44 4750.14,4049.35 4749.42,4048.15 4748.38,4045.56 4748.1,4044.27
  region net MCU_SDA: 4748,4013.65 4742,4013.65 4741.87,4015.18 4741.48,4016.4 4740.89,4017.41 4740.12,4018.28 4738.2,4019.95 4735.99,4022.06 4754.01,4022.06 4751.8,4019.95 4749.88,4018.28 4749.11,4017.41 4748.52,4016.4 4748.13,4015.18
  region net MCU_SDA: 4742,4006.01 4748,4006.01 ccw(c4765.24,4006.01) 4750.54,3997.01 4737.5,3997.01 ccw(c4730.75,4006.01)
  region net GND: 4753.87,5309.56 4756.36,5315.55 4757.51,5314.61 4758.68,5314.02 4759.9,5313.7 4761.16,5313.61 4763.87,5313.84 4766.89,5314.19 4756.02,5299.82 4755.79,5301.47 4755.76,5302.87 4755.87,5305.19 4755.8,5306.22 4755.52,5307.26 4754.91,5308.35
  region net GND: 4743.69,5328.23 4737.48,5325.95 ccw(c4727.93,5313.22) 4727.93,5329.13 4740.51,5337.77 ccw(c4756.42,5337.77)
  region net HALL_RC: 4712.55,4941.1 4709.44,4935.73 ccw(c4699.9,4923) 4699.9,4938.91 4709.37,4950.65 ccw(c4725.28,4950.65)
  region net 3.3V: 4783.65,4380 4783.65,4390 4784.79,4390.09 4785.92,4390.34 4788.14,4391.25 4790.21,4392.53 4792.06,4394.01 4792.06,4375.99 4790.21,4377.47 4788.14,4378.75 4785.92,4379.66 4784.79,4379.91
  region net 3.3V: 4696.07,5397 4696.07,5403 ccw(c4696.07,5414.25) 4705.07,5407.5 4705.07,5392.5 ccw(c4696.07,5385.75)
  region net GND: 4692.29,4134.53 4702.29,4134.53 4702.57,4131.77 4703.32,4129.16 4704.37,4126.75 4705.58,4124.59 4707.84,4121.24 4708.58,4120.15 4708.87,4119.53 4685.72,4119.53 4686,4120.15 4686.74,4121.24 4689,4124.59 4690.21,4126.75 4691.26,4129.16 4692.01,4131.77
  region net GND: 4702.29,4265.47 4692.29,4265.47 4692.01,4268.23 4691.26,4270.84 4690.21,4273.25 4689,4275.41 4686.74,4278.76 4686,4279.85 4685.72,4280.47 4708.87,4280.47 4708.58,4279.85 4707.84,4278.76 4705.58,4275.41 4704.37,4273.25 4703.32,4270.84 4702.57,4268.23
  region net 3.3V: 4694.4,3965.19 4691.29,3959.81 ccw(c4681.74,3947.08) 4681.74,3962.99 4691.22,3974.73 ccw(c4707.13,3974.73)
  region net HALL_RC: 4690.49,4981.93 4696.49,4981.93 ccw(c4707.74,4981.93) 4700.99,4972.93 4685.99,4972.93 ccw(c4679.24,4981.93)
  region net HALL_RC: 4696.49,4998.28 4690.49,4998.28 ccw(c4679.24,4998.28) 4685.99,5007.28 4700.99,5007.28 ccw(c4707.74,4998.28)
  region net $1N13047: 4696.49,4734.91 4690.49,4734.91 ccw(c4679.24,4734.91) 4685.99,4743.91 4700.99,4743.91 ccw(c4707.74,4734.91)
  region net GND: 4677.76,3910 4677.76,3920 4678.9,3920.09 4680.03,3920.34 4682.25,3921.25 4684.32,3922.53 4686.17,3924.01 4686.17,3905.99 4684.32,3907.47 4682.25,3908.75 4680.03,3909.66 4678.9,3909.91
  region net IR1_RECV: 4677.55,4805.73 4674.44,4811.1 ccw(c4661.71,4820.65) 4677.62,4820.65 4687.09,4808.91 ccw(c4687.09,4793)
  region net IR1_RC: 4675.9,5079.22 4673.63,5085.43 ccw(c4660.9,5094.97) 4676.81,5094.97 4685.45,5082.4 ccw(c4685.45,5066.49)
  region net GND: 4702.29,4115 cw(c4732.29,4115) 4732.29,4145 4732.29,4155 cw(c4732.29,4185) 4702.29,4185 4692.29,4185 cw(c4662.29,4185) 4662.29,4155 4662.29,4145 cw(c4662.29,4115) 4692.29,4115
  region net 3.3V: 4643.46,5435.78 4638.43,5432.33 ccw(c4628.88,5419.6) 4628.88,5435.51 4640.28,5445.33 ccw(c4656.19,5445.33)
  region net GND: 4696.07,5341.88 4696.07,5347.88 ccw(c4696.07,5359.13) 4705.07,5352.38 4705.07,5337.38 ccw(c4696.07,5330.63)
  region net RGB_OUT: 4617.58,5206.35 4623.58,5206.35 4623.72,5204.82 4624.1,5203.6 4624.69,5202.59 4625.46,5201.72 4627.38,5200.05 4629.59,5197.94 4611.58,5197.94 4613.78,5200.05 4615.7,5201.72 4616.47,5202.59 4617.07,5203.6 4617.45,5204.82
  region net RGB_OUT: 4623.58,5229.66 4617.58,5229.66 ccw(c4606.33,5229.66) 4613.08,5238.66 4628.08,5238.66 ccw(c4634.83,5229.66)
  region net 3.3V: 4603.3,4755.92 4603.3,4765.92 ccw(c4603.3,4784.67) 4618.3,4773.42 4618.3,4748.42 ccw(c4603.3,4737.17)
  region net 3.3V: 4603.3,4820.92 4603.3,4830.92 ccw(c4603.3,4849.67) 4618.3,4838.42 4618.3,4813.42 ccw(c4603.3,4802.17)
  region net MOTOR_LOUT: 4595,3825 4615,3825 ccw(c4630,3852.03) 4630,3821.12 4594.39,3821.12 ccw(c4582.37,3825)
  region net 3.3V: 4625,4820.92 ccw(c4625,4770.92) 4595,4810.92 4590,4825.92 4595,4840.92 ccw(c4625,4880.92) 4625,4830.92
  region net 3.3V: 4625,4755.92 ccw(c4625,4705.92) 4595,4745.92 4590,4760.92 4595,4775.92 ccw(c4625,4815.92) 4625,4765.92
  region net MOTOR_LOUT: 4570,3922.57 4550,3922.57 4550.1,3925.73 4550.11,3928.58 4549.93,3929.93 4549.56,3931.23 4548.93,3932.51 4548,3933.77 4572,3933.77 4571.07,3932.51 4570.44,3931.23 4570.07,3929.93 4569.89,3928.58 4569.9,3925.73
  region net MOTOR_LOUT: 4550,3917.26 4570,3916.29 4569.88,3913.13 4569.82,3910.31 4569.96,3908.98 4570.29,3907.68 4570.88,3906.39 4571.77,3905.09 4547.79,3906.06 4548.77,3907.28 4549.43,3908.54 4549.84,3909.85 4550.05,3911.2 4550.09,3914.09
  region net MOTOR_LOUT: 4569.35,3873.22 4549.35,3873.22 4549.45,3876.38 4549.46,3879.24 4549.28,3880.58 4548.91,3881.88 4548.28,3883.16 4547.35,3884.42 4571.35,3884.42 4570.41,3883.16 4569.79,3881.88 4569.42,3880.58 4569.24,3879.24 4569.25,3876.38
  region net GND: 4548.81,5318.46 4548,5326.14 4548.62,5326.96 4549.09,5328.01 4549.73,5330.49 4550.18,5333.1 4550.71,5335.32 4559.54,5319.62 4556.6,5320.2 4553.77,5320.43 4552.42,5320.31 4551.14,5319.97 4549.93,5319.37
  region net GND: 4567.28,5345.41 4573.11,5342.76 4572.29,5341.72 4571.89,5340.72 4571.85,5339.73 4572.07,5338.72 4572.93,5336.52 4573.4,5335.27 4573.79,5333.87 4558.1,5342.71 4560.32,5343.23 4562.92,5343.69 4565.41,5344.33 4566.45,5344.8
  region net GND: 4522.76,5300.9 4525.36,5295.01 ccw(c4538.09,5285.47) 4522.18,5285.47 4513.22,5297.72 ccw(c4513.22,5313.63)
  region net HALL_OUT: 4603.3,4950.92 4603.3,4960.92 ccw(c4603.3,4979.67) 4618.3,4968.42 4618.3,4943.42 ccw(c4603.3,4932.17)
  region net MOTOR_HOUT: 4535.33,3903.22 4515.33,3903.22 4515.44,3906.38 4515.44,3909.24 4515.26,3910.58 4514.89,3911.88 4514.27,3913.16 4513.33,3914.42 4537.33,3914.42 4536.4,3913.16 4535.77,3911.88 4535.4,3910.58 4535.23,3909.24 4535.23,3906.38
  region net MOTOR_HOUT: 4515.33,3851.12 4535.33,3851.12 ccw(c4572.83,3851.12) 4550.33,3821.12 4515.65,3821.12 ccw(c3086.96,3821.12)
  region net MOTOR_HOUT: 4535.33,3953.22 4515.33,3953.22 4515.44,3956.38 4515.44,3959.24 4515.26,3960.58 4514.89,3961.88 4514.27,3963.16 4513.33,3964.42 4537.33,3964.42 4536.4,3963.16 4535.77,3961.88 4535.4,3960.58 4535.23,3959.24 4535.23,3956.38
  region net MOTOR_HOUT: 4515.33,3946.78 4535.33,3946.78 4535.23,3943.62 4535.23,3940.76 4535.4,3939.42 4535.77,3938.12 4536.4,3936.84 4537.33,3935.58 4513.33,3935.58 4514.27,3936.84 4514.89,3938.12 4515.26,3939.42 4515.44,3940.76 4515.44,3943.62
  region net 3.3V: 4585,4890 ccw(c4535,4890) 4575,4920 4590,4925 4605,4920 ccw(c4645,4890) 4595,4890
  region net $1N10852: 4523.51,5497.75 4525.36,5491.12 ccw(c4538.09,5481.57) 4522.18,5481.57 4513.96,5494.57 ccw(c4513.96,5510.48)
  region net GND: 4469.49,4983.91 4459.6,4973.91 4455.38,4973.93 4453.38,4973.85 4451.19,4973.61 4461.08,4988.67 4461.56,4987.48 4462.29,4986.48 4463.22,4985.66 4464.3,4985 4465.51,4984.51 4466.81,4984.17
  region net 3.3V: 4446.59,3664.41 4466.59,3664.41 4466.68,3661.76 4466.91,3659.26 4467.6,3654.88 4468.29,3651.66 4468.6,3650 4444.59,3650 4444.9,3651.66 4445.59,3654.88 4446.28,3659.26 4446.51,3661.76
  region net 3.3V: 4466.59,3653.32 4446.59,3653.32 ccw(c4395.29,3653.32) 4436.91,3683.32 4476.28,3683.32 ccw(c4517.9,3653.32)
  region net 3.3V: 4446.59,3629.41 4466.59,3629.41 4466.68,3626.76 4466.91,3624.26 4467.6,3619.88 4468.29,3616.66 4468.6,3615 4444.59,3615 4444.9,3616.66 4445.59,3619.88 4446.28,3624.26 4446.51,3626.76
  region net 3.3V: 4466.59,3635.59 4446.59,3635.59 4446.51,3638.24 4446.28,3640.74 4445.59,3645.12 4444.9,3648.34 4444.59,3650 4468.6,3650 4468.29,3648.34 4467.6,3645.12 4466.91,3640.74 4466.68,3638.24
  region net GND: 4395.11,3611.88 4380.97,3597.74 4379.04,3599.55 4377.11,3601.16 4373.52,3603.77 4370.76,3605.56 4369.36,3606.51 4386.34,3623.49 4387.3,3622.1 4389.08,3619.33 4391.69,3615.75 4393.3,3613.81
  region net GND: 4367.85,3664.41 4387.85,3664.41 4387.94,3661.76 4388.17,3659.26 4388.86,3654.88 4389.55,3651.66 4389.86,3650 4365.85,3650 4366.16,3651.66 4366.85,3654.88 4367.54,3659.26 4367.77,3661.76
  region net GND: 4387.85,3653.32 4367.85,3653.32 ccw(c4316.55,3653.32) 4358.17,3683.32 4397.54,3683.32 ccw(c4439.16,3653.32)
  region net GND: 4367.85,3629.41 4387.85,3629.41 4387.94,3626.76 4388.17,3624.26 4388.86,3619.88 4389.55,3616.66 4389.86,3615 4365.85,3615 4366.16,3616.66 4366.85,3619.88 4367.54,3624.26 4367.77,3626.76
  region net GND: 4387.85,3635.59 4367.85,3635.59 4367.77,3638.24 4367.54,3640.74 4366.85,3645.12 4366.16,3648.34 4365.85,3650 4389.86,3650 4389.55,3648.34 4388.86,3645.12 4388.17,3640.74 4387.94,3638.24
  region net K_ONLINE: 4289.11,3664.41 4309.11,3664.41 4309.2,3661.76 4309.43,3659.26 4310.12,3654.88 4310.81,3651.66 4311.12,3650 4287.11,3650 4287.42,3651.66 4288.11,3654.88 4288.8,3659.26 4289.03,3661.76
  region net K_ONLINE: 4309.11,3653.32 4289.11,3653.32 ccw(c4237.81,3653.32) 4279.43,3683.32 4318.8,3683.32 ccw(c4360.42,3653.32)
  region net K_ONLINE: 4309.11,3635.59 4289.11,3635.59 4289.03,3638.24 4288.8,3640.74 4288.11,3645.12 4287.42,3648.34 4287.11,3650 4311.12,3650 4310.81,3648.34 4310.12,3645.12 4309.43,3640.74 4309.2,3638.24
  region net K_ONLINE: 4289.11,3629.41 4309.11,3629.41 4309.2,3626.76 4309.43,3624.26 4310.12,3619.88 4310.81,3616.66 4311.12,3615 4287.11,3615 4287.42,3616.66 4288.11,3619.88 4288.8,3624.26 4289.03,3626.76
  region net K_PULL: 4230.37,3635.59 4210.37,3635.59 4210.29,3638.24 4210.06,3640.74 4209.37,3645.12 4208.68,3648.34 4208.37,3650 4232.38,3650 4232.07,3648.34 4231.38,3645.12 4230.69,3640.74 4230.46,3638.24
  region net K_PULL: 4210.37,3629.41 4230.37,3629.41 4230.46,3626.76 4230.69,3624.26 4231.38,3619.88 4232.07,3616.66 4232.38,3615 4208.37,3615 4208.68,3616.66 4209.37,3619.88 4210.06,3624.26 4210.29,3626.76
  region net K_PULL: 4210.37,3664.41 4230.37,3664.41 4230.46,3661.76 4230.69,3659.26 4231.38,3654.88 4232.07,3651.66 4232.38,3650 4208.37,3650 4208.68,3651.66 4209.37,3654.88 4210.06,3659.26 4210.29,3661.76
  region net K_PULL: 4230.37,3653.32 4210.37,3653.32 ccw(c4159.07,3653.32) 4200.69,3683.32 4240.06,3683.32 ccw(c4281.68,3653.32)
  region net RGB_OUT: 4131.63,3629.41 4151.63,3629.41 4151.72,3626.76 4151.95,3624.26 4152.64,3619.88 4153.33,3616.66 4153.64,3615 4129.63,3615 4129.94,3616.66 4130.63,3619.88 4131.32,3624.26 4131.55,3626.76
  region net RGB_OUT: 4151.63,3635.59 4131.63,3635.59 4131.55,3638.24 4131.32,3640.74 4130.63,3645.12 4129.94,3648.34 4129.63,3650 4153.64,3650 4153.33,3648.34 4152.64,3645.12 4151.95,3640.74 4151.72,3638.24
  region net RGB_OUT: 4131.63,3664.41 4151.63,3664.41 4151.72,3661.76 4151.95,3659.26 4152.64,3654.88 4153.33,3651.66 4153.64,3650 4129.63,3650 4129.94,3651.66 4130.63,3654.88 4131.32,3659.26 4131.55,3661.76
  region net RGB_OUT: 4151.63,3653.32 4131.63,3653.32 ccw(c4080.33,3653.32) 4121.95,3683.32 4161.32,3683.32 ccw(c4202.94,3653.32)
  region net GND: 4052.89,3664.41 4072.89,3664.41 4072.98,3661.76 4073.21,3659.26 4073.9,3654.88 4074.59,3651.66 4074.9,3650 4050.89,3650 4051.2,3651.66 4051.89,3654.88 4052.58,3659.26 4052.81,3661.76
  region net GND: 4072.89,3653.32 4052.89,3653.32 ccw(c4001.59,3653.32) 4043.21,3683.32 4082.58,3683.32 ccw(c4124.2,3653.32)
  region net GND: 4052.89,3629.41 4072.89,3629.41 4072.98,3626.76 4073.21,3624.26 4073.9,3619.88 4074.59,3616.66 4074.9,3615 4050.89,3615 4051.2,3616.66 4051.89,3619.88 4052.58,3624.26 4052.81,3626.76
  region net GND: 4072.89,3635.59 4052.89,3635.59 4052.81,3638.24 4052.58,3640.74 4051.89,3645.12 4051.2,3648.34 4050.89,3650 4074.9,3650 4074.59,3648.34 4073.9,3645.12 4073.21,3640.74 4072.98,3638.24
  region net MCU_SDA: 3974.15,3629.41 3994.15,3629.41 3994.24,3626.76 3994.47,3624.26 3995.16,3619.88 3995.85,3616.66 3996.16,3615 3972.15,3615 3972.46,3616.66 3973.15,3619.88 3973.84,3624.26 3974.07,3626.76
  region net MCU_SDA: 3994.15,3635.59 3974.15,3635.59 3974.07,3638.24 3973.84,3640.74 3973.15,3645.12 3972.46,3648.34 3972.15,3650 3996.16,3650 3995.85,3648.34 3995.16,3645.12 3994.47,3640.74 3994.24,3638.24
  region net MCU_SDA: 3974.15,3664.41 3994.15,3664.41 3994.24,3661.76 3994.47,3659.26 3995.16,3654.88 3995.85,3651.66 3996.16,3650 3972.15,3650 3972.46,3651.66 3973.15,3654.88 3973.84,3659.26 3974.07,3661.76
  region net MCU_SDA: 3994.15,3653.32 3974.15,3653.32 ccw(c3922.85,3653.32) 3964.47,3683.32 4003.84,3683.32 ccw(c4045.46,3653.32)
  region net MCU_SCL: 3895.41,3664.41 3915.41,3664.41 3915.5,3661.76 3915.73,3659.26 3916.42,3654.88 3917.11,3651.66 3917.42,3650 3893.41,3650 3893.72,3651.66 3894.41,3654.88 3895.1,3659.26 3895.33,3661.76
  region net MCU_SCL: 3915.41,3653.32 3895.41,3653.32 ccw(c3844.11,3653.32) 3885.73,3683.32 3925.1,3683.32 ccw(c3966.72,3653.32)
  region net MCU_SCL: 3915.41,3635.59 3895.41,3635.59 3895.33,3638.24 3895.1,3640.74 3894.41,3645.12 3893.72,3648.34 3893.41,3650 3917.42,3650 3917.11,3648.34 3916.42,3645.12 3915.73,3640.74 3915.5,3638.24
  region net MCU_SCL: 3895.41,3629.41 3915.41,3629.41 3915.5,3626.76 3915.73,3624.26 3916.42,3619.88 3917.11,3616.66 3917.42,3615 3893.41,3615 3893.72,3616.66 3894.41,3619.88 3895.1,3624.26 3895.33,3626.76